# Altium PCB ad_test2_PCB.PcbDoc
Units mm, origin at the board's own origin, x right, y up, seen from the top; angles counter-clockwise.
Board outline 55.88 x 22.1 mm, 2 copper layers (Top Layer, Bottom Layer); 23 components, 22 nets, 95 pads, 21 vias.
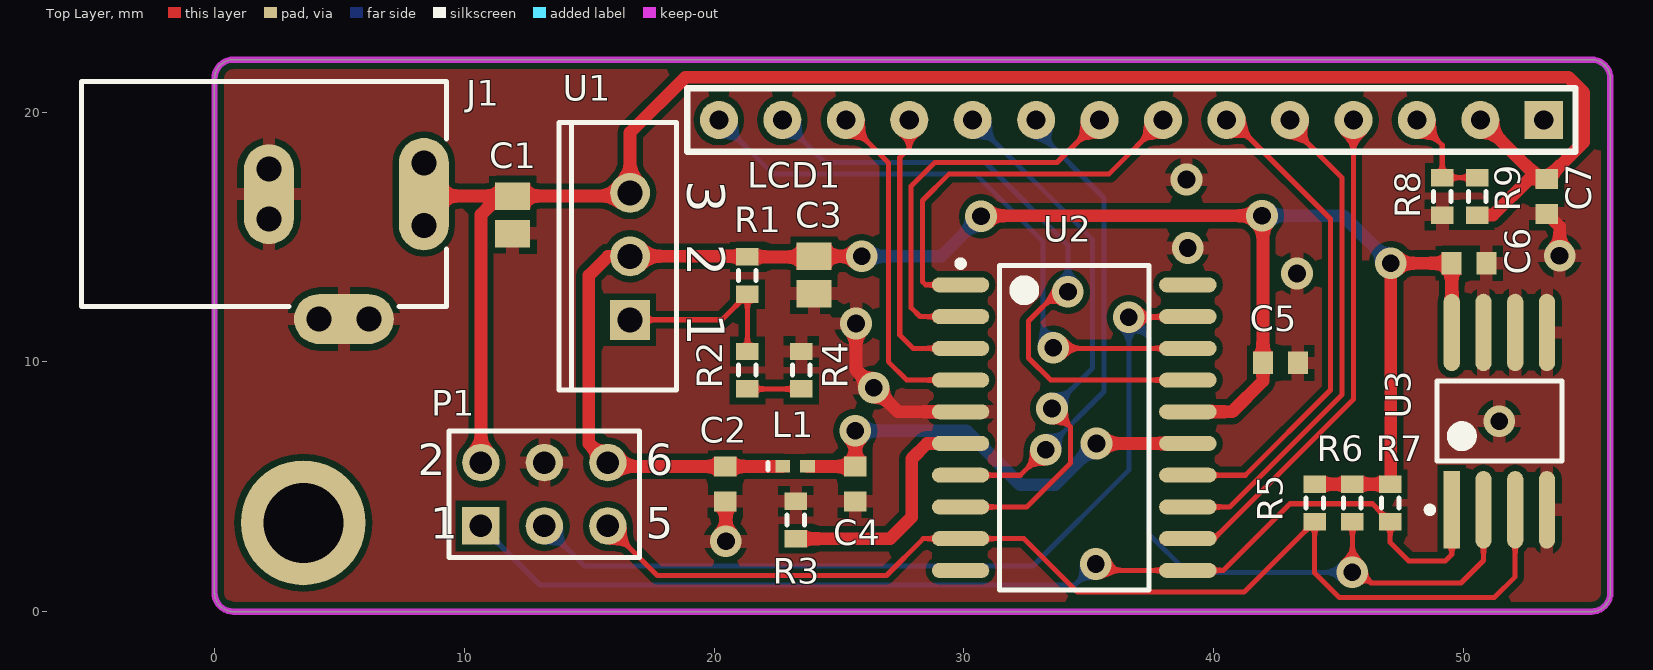
[diagram p0: Top Layer view]
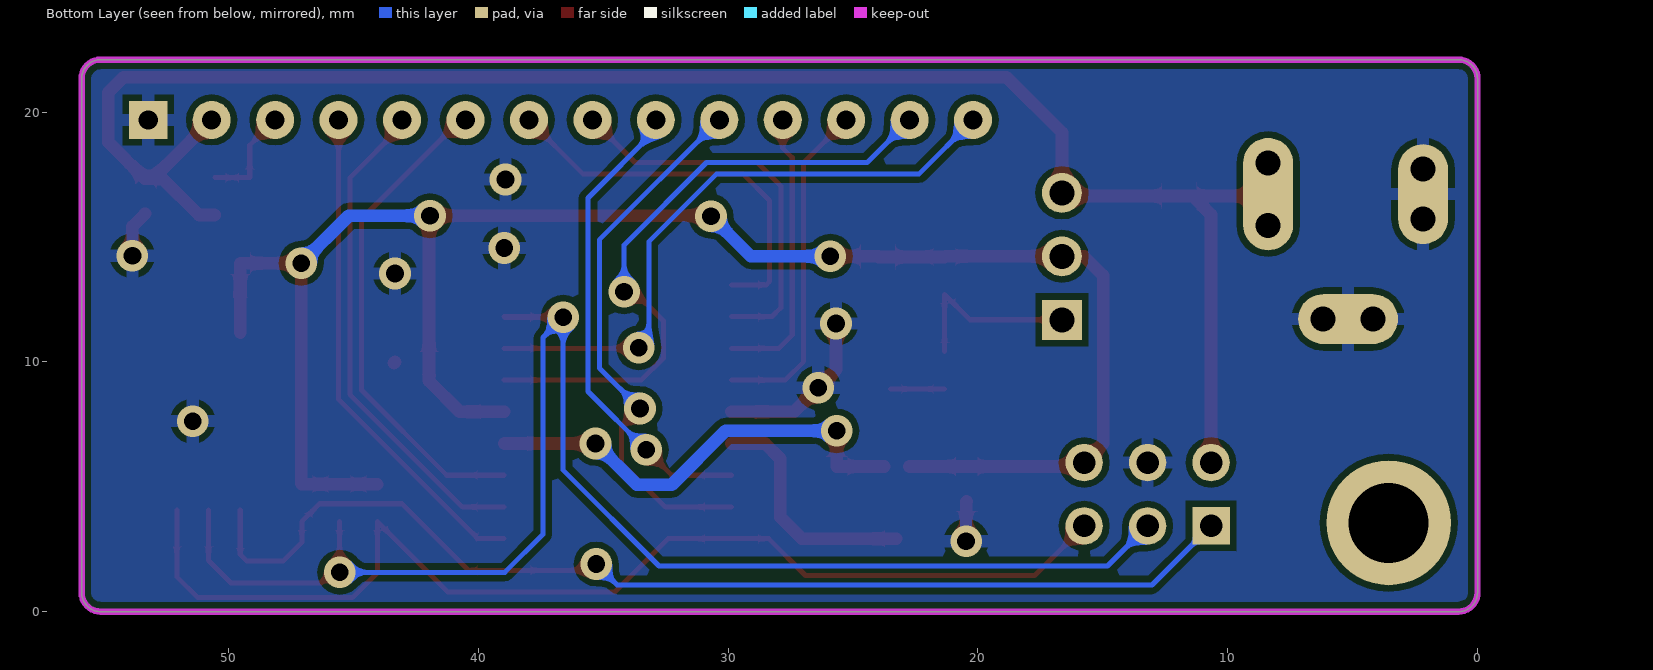
[diagram p1: Bottom Layer view, seen from below]

## Layer stack, top to bottom
Top Solder: solder mask 0.0102, Solder Resist, Dk 3.5
Top Layer: signal copper 0.0356
Dielectric 1: dielectric 0.32, FR-4, Dk 4.8
Bottom Layer: signal copper 0.0356
Bottom Solder: solder mask 0.0102, Solder Resist, Dk 3.5

## Board outline
0,0.762 0,21.336 cw(c0.762,21.336) 0.762,22.098 55.118,22.098 cw(c55.118,21.336) 55.88,21.336 55.88,0.762 cw(c55.118,0.762) 55.118,0 0.762,0 cw(c0.762,0.762)

## Design rules (kind name [scope] priority, off if disabled: settings)
Clearance [All] p1: gap=0.254 ignorepadtopadclearanceinfootprint=FALSE except(0: Arc-Hole Track-Hole SMDPad-Hole THPad-Hole Via-Hole Fill-Hole Poly-Hole Region-Hole Text-Hole)
HoleSize [All] p1: absolutevalues=TRUE maxlimit=5.08 minlimit=0.025 maxpercent=80.000 minpercent=20.000
MinimumSolderMaskSliver [All] p1: minsoldermaskwidth=0.127
PolygonConnect [All] p1: connectstyle=Relief reliefconductorwidth=0.508 reliefentries=4 polygonreliefangle="90 Angle" airgapwidth=0.254
RoutingVias [All] p1: holewidth=0.711 width=1.27 viastyle="Through Hole" minholewidth=0.711 minwidth=1.27 maxholewidth=0.711 maxwidth=1.27
SilkToSilkClearance [All] p1: silktosilkclearance=0.025
SilkToSolderMaskClearance [IsPad] p1: minsilkscreentomaskgap=0.025 clearancetoexposedcopper=TRUE
SolderMaskExpansion [All] p1: expansion=0.102
Width [All] p1: maxlimit=0.508 minlimit=0.203 preferedwidth=0.254
26 further rules are at their usual default settings.

## Classes and differential pairs
net class RB[0..7]: RB0 RB1 RB2 RB3 RB4 RB5 RB6 RB7
component class Sensor: C4 U3
component class Power: C1 C2 C3 C4 J1 L1 R4 R5 R8 R9 U2
component class MCU: C2 R5 R7 R9 U2
component class LCD: C4 R5 R9
component class ad_test2_top: P1

## Components (designator, comment, footprint, x,y, rotation, side; value= is the part's Value field where it differs from the comment)
C1 "Cap Pol3" C0805 11.938,15.887 r270 top value=100pF (schematic designator C4)
C2 "Cap Semi" 1608[0603] 20.447,5.113 r90 top value=100pF (schematic designator C5)
C3 "Cap Pol3" C0805 24.003,13.474 r270 top value=100pF
C4 "Cap Semi" 1608[0603] 25.654,5.113 r90 top value=100pF (schematic designator C6)
C5 "Cap Semi" 1608[0603] 42.672,9.957 r180 top value=100pF (schematic designator C2)
C6 "Cap Semi" 1608[0603] 50.227,13.945 r180 top value=100pF (schematic designator C7)
C7 "Cap Semi" 1608[0603] 53.34,16.625 r90 top value=100pF (schematic designator C1)
J1 "PWR2.5" KLD-0202 -5.318,16.713 r0 top
L1 "Inductor" 0402-A 23.249,5.813 r0 top value=10mH
LCD1 "DMC-50448N" DMC-50448N 53.213,19.685 r180 top
P1 "Header 3X2" HDR2X3 10.668,3.429 r0 top
R1 "Res3" J1-0603 21.336,13.45 r270 top value=4.7K (schematic designator R6)
R2 "Res3" J1-0603 21.336,9.664 r270 top value=4.7K (schematic designator R7)
R3 "Res3" J1-0603 23.274,3.666 r270 top value=1K (schematic designator R8)
R4 "Res3" J1-0603 23.495,9.664 r90 top value=4.7K (schematic designator R9)
R5 "Res3" J1-0603 44.044,4.355 r270 top value=1K (schematic designator R3)
R6 "Res3" J1-0603 45.555,4.355 r270 top value=1K (schematic designator R4)
R7 "Res3" J1-0603 47.066,4.355 r270 top value=1K (schematic designator R5)
R8 "Res3" J1-0603 49.149,16.625 r270 top value=1K (schematic designator R2)
R9 "Res3" J1-0603 50.546,16.625 r90 top value=1K (schematic designator R1)
U1 "LM317KC" KC03 16.637,14.224 r90 top (schematic designator U2)
U2 "PIC16C770-I/SO" SOIC-SO20_N 34.417,7.366 r0 top (schematic designator U1)
U3 "TCN75" TCN75-SOIC 49.53,4.076 r90 top

## Footprints (in the part's own frame and the unit in brackets; to place one, negate y for a bottom-side part, rotate by r counter-clockwise, add the part's x,y. Pads: shape width x height; smd on the part's side, far side on the other; paste and mask are expansions set on the pad)
0402-A [mm] "Chip Inductor, Body 1.0x0.5mm, IPC High Density"
  rect 0.6x0.5 smd: 1(-0.5,0) 2(0.5,0)
  silkscreen extent -1.1,-0.15 -1.1,0.15, body extent -0.55,-0.3 0.55,0.3, height 0.55
1608[0603] [mm] "Chip Capacitor, Body 1.6x0.8mm, IPC High Density"
  rect 0.8x0.9 smd: 1(-0.7,0) 2(0.7,0)
  body extent -0.87,-0.48 0.87,0.48, height 1.3
C0805 [mm] "Chip Capacitor, Body 2.0x1.3mm, IPC High Density"
  rect 1.1x1.4 smd: 1(-0.75,0) 2(0.75,0)
  body extent -1.1,-0.72 1.1,0.72, height 1.4
DMC-50448N [mil] "LCD,DMC-50448N"
  rect 60x60 hole 30: 1(0,0)
  round 60 hole 30: 2(100,0) 3(200,0) 4(300,0) 5(400,0) 6(500,0) 7(600,0) 8(700,0) 9(800,0) 10(900,0) 11(1000,0) 12(1100,0) 13(1200,0) 14(1300,0)
  silkscreen extent -50,-50 1350,50, body extent -10,50 -10,50, height 10
HDR2X3 [mm] "Connector; Header; 3x2 Position"
  rect 1.5x1.5 hole 0.9: 1(0,0)
  round 1.5 hole 0.9: 2(0,2.54) 3(2.54,0) 4(2.54,2.54) 5(5.08,0) 6(5.08,2.54)
  silkscreen extent -1.27,-1.27 6.35,3.81
J1-0603 [mm] "Chip Resistor, Body 1.6x0.8mm, IPC High Density"
  rect 0.7x0.9 smd: 1(-0.75,0) 2(0.75,0)
  silkscreen extent -0.2,-0.35 0.2,0.35, body extent -0.85,-0.48 0.85,0.48, height 0.9
KC03 [mm] "TO, Thru-Hole, Vertical, Heatsink Mounted; 3 In-Line Leads; Pitch 2.54 mm"
  rect 1.6x1.6 hole 1: 1(-2.54,0)
  round 1.6 hole 1: 2(0,0) 3(2.54,0)
  silkscreen extent -5.35,-1.85 5.35,2.85
KLD-0202 [mm] "DC Power Jack, 2.5mm, KLD Series, PCB Mount"
  oval 2x4.5 all layers, no hole: 1(13.7,0)
  round 1.5 hole 1: 1A(13.7,-1.25) 1B(13.7,1.25) 2A(7.5,-1) 2B(7.5,1) 3A(9.5,-5) 3B(11.5,-5)
  oval 2x4 all layers, no hole: 2(7.5,0)
  oval 4x2 all layers, no hole: 3(10.5,-5)
  silkscreen extent 0,-4.5 14.6,4.5
SOIC-SO20_N [mm] "SOIC, 20-Leads, Body 12.8x7.5mm, Pitch 1.27mm, IPC Medium Density"
  oval 2.3x0.6 smd: 1(-4.55,5.715) 2(-4.55,4.445) 3(-4.55,3.175) 4(-4.55,1.905) 5(-4.55,0.635) 6(-4.55,-0.635) 7(-4.55,-1.905) 8(-4.55,-3.175) 9(-4.55,-4.445) 10(-4.55,-5.715) 11(4.55,-5.715) 12(4.55,-4.445) 13(4.55,-3.175) 14(4.55,-1.905) 15(4.55,-0.635) 16(4.55,0.635) 17(4.55,1.905) 18(4.55,3.175) 19(4.55,4.445) 20(4.55,5.715)
  silkscreen extent -4.67,-6.5 3,6.69, body extent -3.75,-6.5 3.75,6.5, height 2.65
TCN75-SOIC [mm] "TCN75-SOIC, 8-Leads, Body 4.90x3.90mm, Pitch 1.27mm, IPC Low Density"
  rect 3.1x0.65 smd: 1(0,0)
  oval 3.1x0.65 smd: 2(0,-1.27) 3(0,-2.54) 4(0,-3.81) 5(7.1,-3.81) 6(7.1,-2.54) 7(7.1,-1.27) 8(7.1,0)
  silkscreen extent -0.12,-4.41 5.15,1, body extent 1.55,-4.41 5.55,0.6, height 1.75

## Part data
C1 C3: "Polarized Capacitor (Surface Mount)", LatestRevisionDate=29-May-2009, LatestRevisionNote="IPC-7351 Footprint Added.", PackageDescription="Chip Capacitor", PackageReference=C0805, Published=8-Jun-2000, Publisher="Altium Limited"
C2 C4 C5 C6 C7: "Capacitor (Semiconductor SIM Model)", LatestRevisionDate=29-May-2009, LatestRevisionNote="IPC-7351 Footprint Added.", PackageDescription="Chip Capacitor", PackageReference=C1206, Published=8-Jun-2000, Publisher="Altium Limited"
J1: "Low Voltage Power Supply Connector", ComponentLink1Description="Manufacturer Link", ComponentLink1URL=http://domino.kycon.com/internet/Products.html, DatasheetDocument=09-May-2002, Published=17-Dec-2003, Publisher="Altium Limited"
LCD1: "8 Character X 2 Line / LCD Display"
P1: "Header, 3-Pin, Dual row", LatestRevisionDate=17-Jul-2002, LatestRevisionNote="Re-released for DXP Platform.", Publisher="Altium Limited"
R1 R2 R3 R4 R5 R6 R7 R8 R9: "Resistor", LatestRevisionDate=29-May-2009, LatestRevisionNote="IPC-7351 Footprint Added.", PackageDescription="Chip Resistor", PackageReference=J1-0603, Published=8-Jun-2000, Publisher="Altium Limited"
U1: "3-Terminal Adjustable Regulator", ComponentLink1Description="Manufacturer Link", ComponentLink1URL=http://www.ti.com/, DatasheetVersion=Feb-1988, Note="Pin 2 is electrically connected to tab", PackageDescription="TO, Thru-Hole, Vertical, Heatsink Mounted; 3 In-Line Leads; Pitch 2.54 mm", PackageReference=KC03, PackageVersion=Sep-1995, Published=15-Apr-2002, Publisher="Altium Limited"
U2: "8-Bit CMOS Microcontroller with 12-Bit A/D, 2K (x14-Bit words) EPROM, 256 Bytes RAM, 20-Pin SOIC, 4.0 to 5.5V Supply Range, Industrial Temperature", Supplier Part Number 1=PIC16C770-I/SO-ND, Code_IPC=SOIC127P1030-20, Code_JEDEC=MS-013-AC, ComponentAvailability="Unknown. Contact manufacturer to determine status.", ComponentLink1Description=Datasheet, ComponentLink1URL=http://ww1.microchip.com/downloads/en/DeviceDoc/41120b.pdf, ComponentLink2Description="Packaging Specification", ComponentLink2URL=http://www.microchip.com/stellent/groups/techpub_sg/documents/packagingspec/en012702.pdf, ComponentLink3Description="Microchip.com Home", ComponentLink3URL=http://www.microchip.com/, DatasheetVersion="revB, Feb-2002", LatestRevisionDate=29-Jan-2009, LatestRevisionNote="Sch. layout revised. 3D Model Removed.", PackageDescription="20-Lead Plastic Small Outline (SO) - Wide 7.50mm Body [SOIC]", PackageReference=SOIC-SO20, PackageVersion="revBB, Aug-2009", Published=11-Oct-2004, Publisher="Altium Limited", Supplier 1=Digi-Key
U3: "TCN75数字温度传感器将-40°C到+125°C范围内的温度转换为数字"
L1: Code_IEC=1005, Code_JEITA=0402, LatestRevisionDate=29-May-2009, LatestRevisionNote="IPC-7351 Footprint Added.", PackageDescription="Chip Inductor", PackageReference=0402-A, Published=8-Jun-2000, Publisher="Altium Limited"

## Free pads (board coordinates)
  round 5 hole 3.2: 0(3.556,3.556)

## Via types
v1: diameter 1.27, hole 0.711, Top Layer to Bottom Layer, 21 vias

## Nets (pads, with @x,y where several pads share a name; then routed paths per layer and width w, separated by ;. In a path a pad name is that pad's centre, name@x,y a point inside that pad or via, vN(x,y) a via of type N, cw(c..) or ccw(c..) an arc to the next point about the centre after c; other vN are vias at no path point)
3V3: C2.2 C3.1 C5.2 C6.2 L1.1 P1.6 R1.1 R5.1 R6.1 R7.1 U1.2 U2.16 U3.8 | length 76
  Top Layer w0.508: L1.1 C2.2 15.904,5.813 P1.6 14.986,6.731 14.986,13.462 15.748,14.224 U1.2 21.312,14.224 R1.1 23.979,14.2 C3.1 v1(25.908,14.224) ; v1(30.683,15.824) 30.709,15.85 v1(41.935,15.85) 41.972,15.813 C5.2 41.972,9.231 40.742,8.001 U2.16 ; R5.1 R6.1 R7.1 47.092,5.131 v1(47.092,13.945) C6.2 49.53,13.942 U3.8
  Bottom Layer w0.508: v1(25.908,14.224) 29.083,14.224 v1(30.683,15.824) ; v1(41.935,15.85) 45.187,15.85 v1(47.092,13.945)
5V: C1.1 C7.2 J1.1 J1.1A J1.1B LCD1.2 P1.2 R9.1 U1.3 | length 71.9
  Top Layer w0.508: J1.1 8.458,16.637 C1.1@11.405,16.637 ; P1.2 10.668,15.9 C1.1@11.405,16.637 ; R9.1 51.181,15.875 52.631,17.325 C7.2@53.033,17.325 ; LCD1.2 C7.2@53.033,17.325 ; C1.1@11.405,16.637 C1.1 16.51,16.637 U1.3 16.637,19.177 18.854,21.394 54.196,21.394 54.813,20.777 54.813,18.798 C7.2 C7.2@53.033,17.325
AGND: R3.2 U2.6 | length 9.5
  Top Layer w0.508: R3.2 27.046,2.916 27.915,3.785 27.915,6.121 28.524,6.731 U2.6
AVDD: C4.2 L1.2 U2.15 | length 18.2
  Top Layer w0.508: L1.2 C4.2 v1(25.654,7.239) ; v1(35.306,6.731) U2.15
  Bottom Layer w0.508: v1(25.654,7.239) 30.099,7.239 32.258,5.08 33.655,5.08 v1(35.306,6.731)
GND: C1.2 C2.1 C3.2 C4.1 C5.1 C6.1 C7.1 J1.2 J1.2A J1.2B J1.3 J1.3A J1.3B LCD1.1 P1.4 R3.1 R4.2 R8.2 U2.5 U3.4 U3.5 U3.6 U3.7 | length 10.3
  Top Layer w0.508: C2.1 20.472,4.388 v1(20.472,2.819) ; v1(25.679,11.532) 25.679,9.677 v1(26.391,8.966) 27.356,8.001 U2.5 ; C5.1@43.332,9.996 C5.1 ; C7.1 53.848,15.417 v1(53.848,14.249)
  other v1: 51.435,7.626 43.332,13.538 38.964,14.554 38.913,17.297
NetLCD1_3: LCD1.3 R8.1 R9.2 | length 4.1
  Top Layer w0.203: LCD1.3 49.149,18.669 R8.1 R9.2
NetLCD1_4: LCD1.4 U2.12 | length 20.1
  Top Layer w0.203: U2.12 40.017,2.921 45.593,8.497 LCD1.4
NetLCD1_5: LCD1.5 U2.13 | length 19.9
  Top Layer w0.203: U2.13 40.64,4.191 45.136,8.687 45.136,17.374 43.053,19.456 LCD1.5
NetLCD1_6: LCD1.6 U2.14 | length 19.8
  Top Layer w0.203: U2.14 41.263,5.461 44.679,8.876 44.679,15.723 40.716,19.685 LCD1.6
NetP1_1: P1.1 R7.2 U2.11 U3.1 | length 44.7
  Top Layer w0.203: v1(35.281,1.905) 35.535,1.651 U2.11 40.386,1.651 43.053,4.318 46.354,4.318 R7.2 47.066,2.769 47.809,2.026 49.27,2.026 49.53,2.286 U3.1
  Bottom Layer w0.203: P1.1 13.03,1.067 34.442,1.067 v1(35.281,1.905)
NetP1_3: P1.3 R6.2 U2.19 U3.2 | length 63
  Top Layer w0.203: v1(36.601,11.786) 38.942,11.786 U2.19 37.338,11.811 ; v1@45.555,1.731 R6.2 ; v1@45.593,1.626 v1(45.542,1.575) 45.87,1.575 46.302,1.143 49.899,1.143 50.8,2.044 U3.2
  Bottom Layer w0.203: P1.3 14.808,1.829 32.766,1.829 36.601,5.664 v1(36.601,11.786) 37.414,10.973 37.414,3.099 38.938,1.575 v1@45.161,1.575
NetP1_5: P1.5 R5.2 U2.9 U3.3 | length 45.3
  Top Layer w0.203: P1.5 17.729,1.448 26.899,1.448 28.372,2.921 U2.9 32.407,2.921 34.549,0.779 41.217,0.779 R5.2 44.044,1.549 45.03,0.563 51.236,0.563 52.07,1.397 U3.3
NetR6_2: R1.2 R2.1 U1.1 | length 7.4
  Top Layer w0.203: U1.1 20.32,11.684 R1.2 R2.1
NetR7_2: R2.2 R4.1 | length 2.2
  Top Layer w0.203: R2.2 R4.1
RB0: LCD1.7 U2.1 | length 15.8
  Top Layer w0.203: U2.1 28.473,13.081 28.346,13.208 28.346,16.459 29.413,17.526 35.814,17.526 LCD1.7
RB1: LCD1.8 U2.2 | length 15.6
  Top Layer w0.203: U2.2 28.245,11.811 27.889,12.167 27.889,17.043 28.829,17.983 33.731,17.983 LCD1.8
RB2: LCD1.9 U2.7 | length 19.1
  Top Layer w0.203: U2.7 32.258,5.461 v1(33.274,6.477)
  Bottom Layer w0.203: LCD1.9 32.893,19.279 35.611,16.561 35.611,8.81 33.278,6.477 v1(33.274,6.477)
RB3: LCD1.10 U2.8 | length 21.8
  Top Layer w0.203: U2.8 32.512,4.191 34.265,5.944 34.265,7.391 v1(33.528,8.128)
  Bottom Layer w0.203: LCD1.10 35.154,14.884 35.154,9.754 v1(33.528,8.128)
RB4: LCD1.11 U2.3 | length 11.4
  Top Layer w0.203: LCD1.11 27.813,18.554 27.432,18.173 27.432,11.074 27.965,10.541 U2.3
RB5: LCD1.12 U2.4 | length 13.6
  Top Layer w0.203: LCD1.12 26.975,17.983 26.975,10.008 27.711,9.271 U2.4
RB6: LCD1.13 U2.17 | length 25.7
  Top Layer w0.203: v1(34.163,12.802) 33.753,12.802 32.588,11.637 32.588,10.156 33.473,9.271 U2.17
  Bottom Layer w0.203: LCD1.13 24.435,17.983 30.861,17.983 34.163,14.681 v1(34.163,12.802)
RB7: LCD1.14 U2.18 | length 24.8
  Top Layer w0.203: v1(33.579,10.566) 33.604,10.541 U2.18
  Bottom Layer w0.203: LCD1.14 22.352,17.526 30.455,17.526 33.172,14.808 33.172,10.973 v1(33.579,10.566)
pads on no net: U2.10 U2.20

## Polygon pours and split planes (outlines as drawn)
GND on Bottom Layer "GND_L02_P003" (solid, remove dead copper, pour order 3): 0,0.762 0,21.336 cw(c0.762,21.336) 0.762,22.098 55.118,22.098 cw(c55.118,21.336) 55.88,21.336 55.88,0.762 cw(c55.118,0.762) 55.118,0 0.762,0 cw(c0.762,0.762)
GND on Top Layer "GND_L01_P002" (solid, remove dead copper, pour order 2): 0,0.762 0,21.336 cw(c0.762,21.336) 0.762,22.098 55.118,22.098 cw(c55.118,21.336) 55.88,21.336 55.88,0.762 cw(c55.118,0.762) 55.118,0 0.762,0 cw(c0.762,0.762)

## Keep-outs
Keep-Out Layer:
  the board outline again, w0.254

## Text inside footprints (layer, text, board x,y; h text height)
P1: Top Overlay "6" at 17.272,5.461 h1.27; Top Overlay "5" at 17.272,2.921 h1.27; Top Overlay "2" at 8.128,5.461 h1.27; Top Overlay "1" at 8.636,2.921 h1.27
U1: Top Overlay "2" at 18.923,14.732 h1.5 r270; Top Overlay "1" at 18.923,11.938 h1.5 r270; Top Overlay "3" at 18.923,17.272 h1.5 r270